# Altium PCB ir-24v.PcbDoc
Units mm, origin at the board's own origin, x right, y up, seen from the top; angles counter-clockwise.
Board outline 326.8 x 258 mm, 2 copper layers (Top Layer, Bottom Layer); 34 components, 31 nets, 92 pads, 0 vias.
Unrouted connection lines stored in the file: 1.
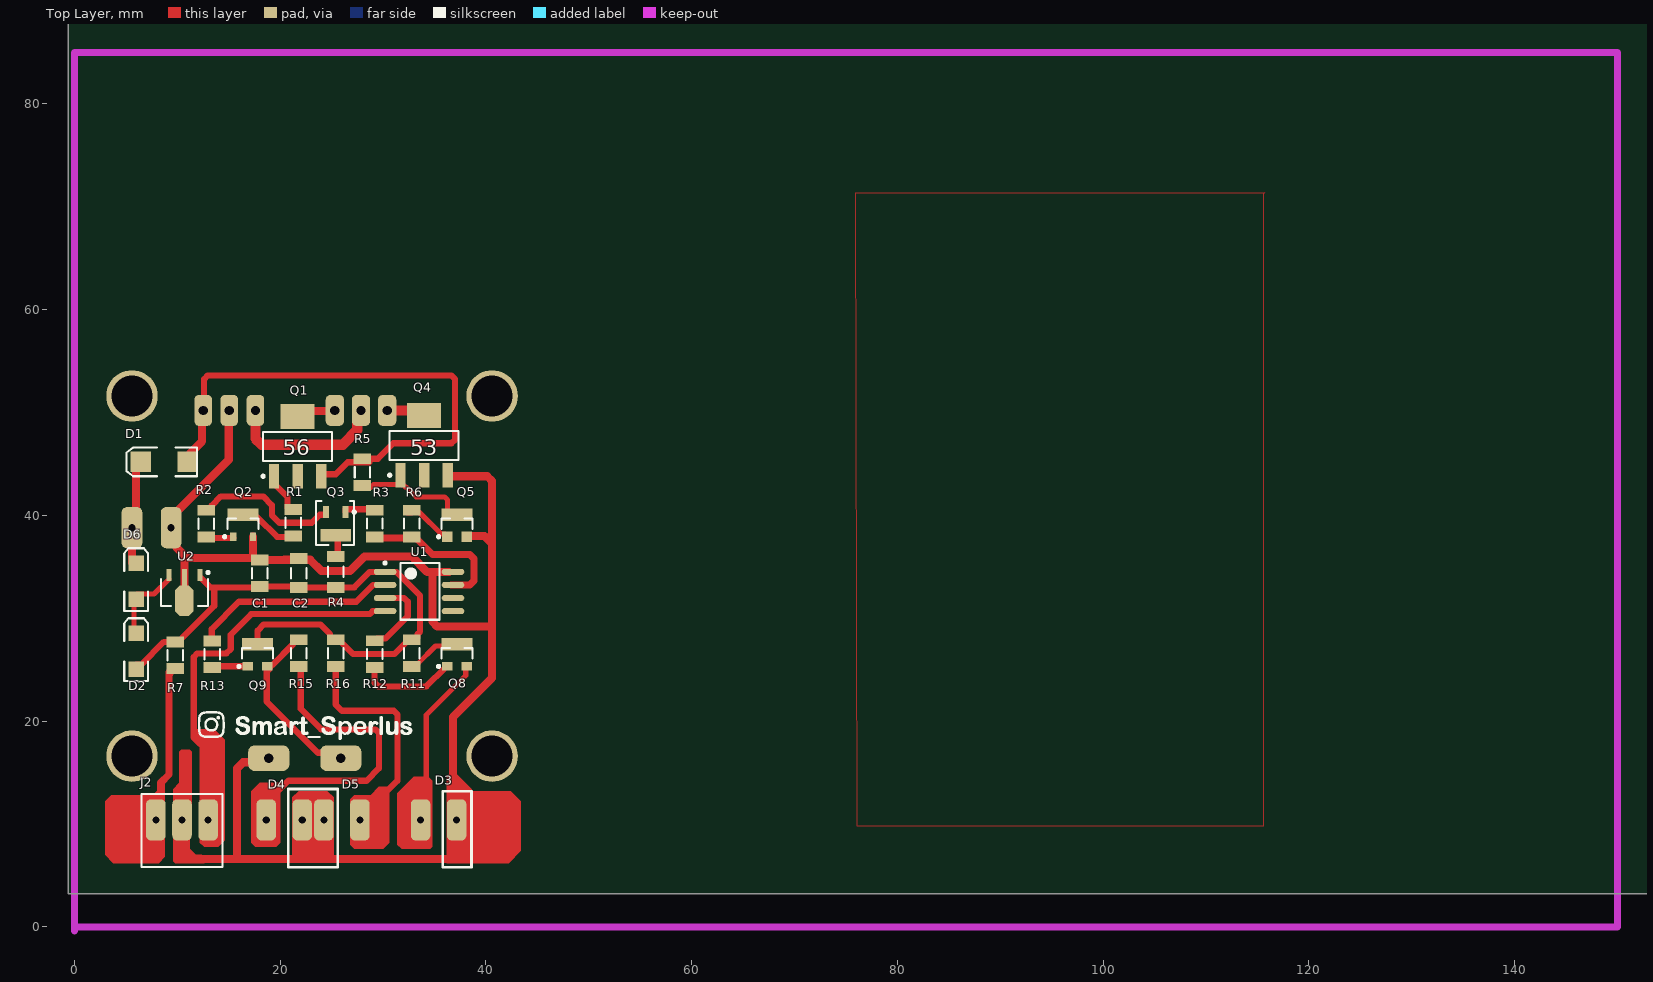
[diagram p0: Top Layer view]
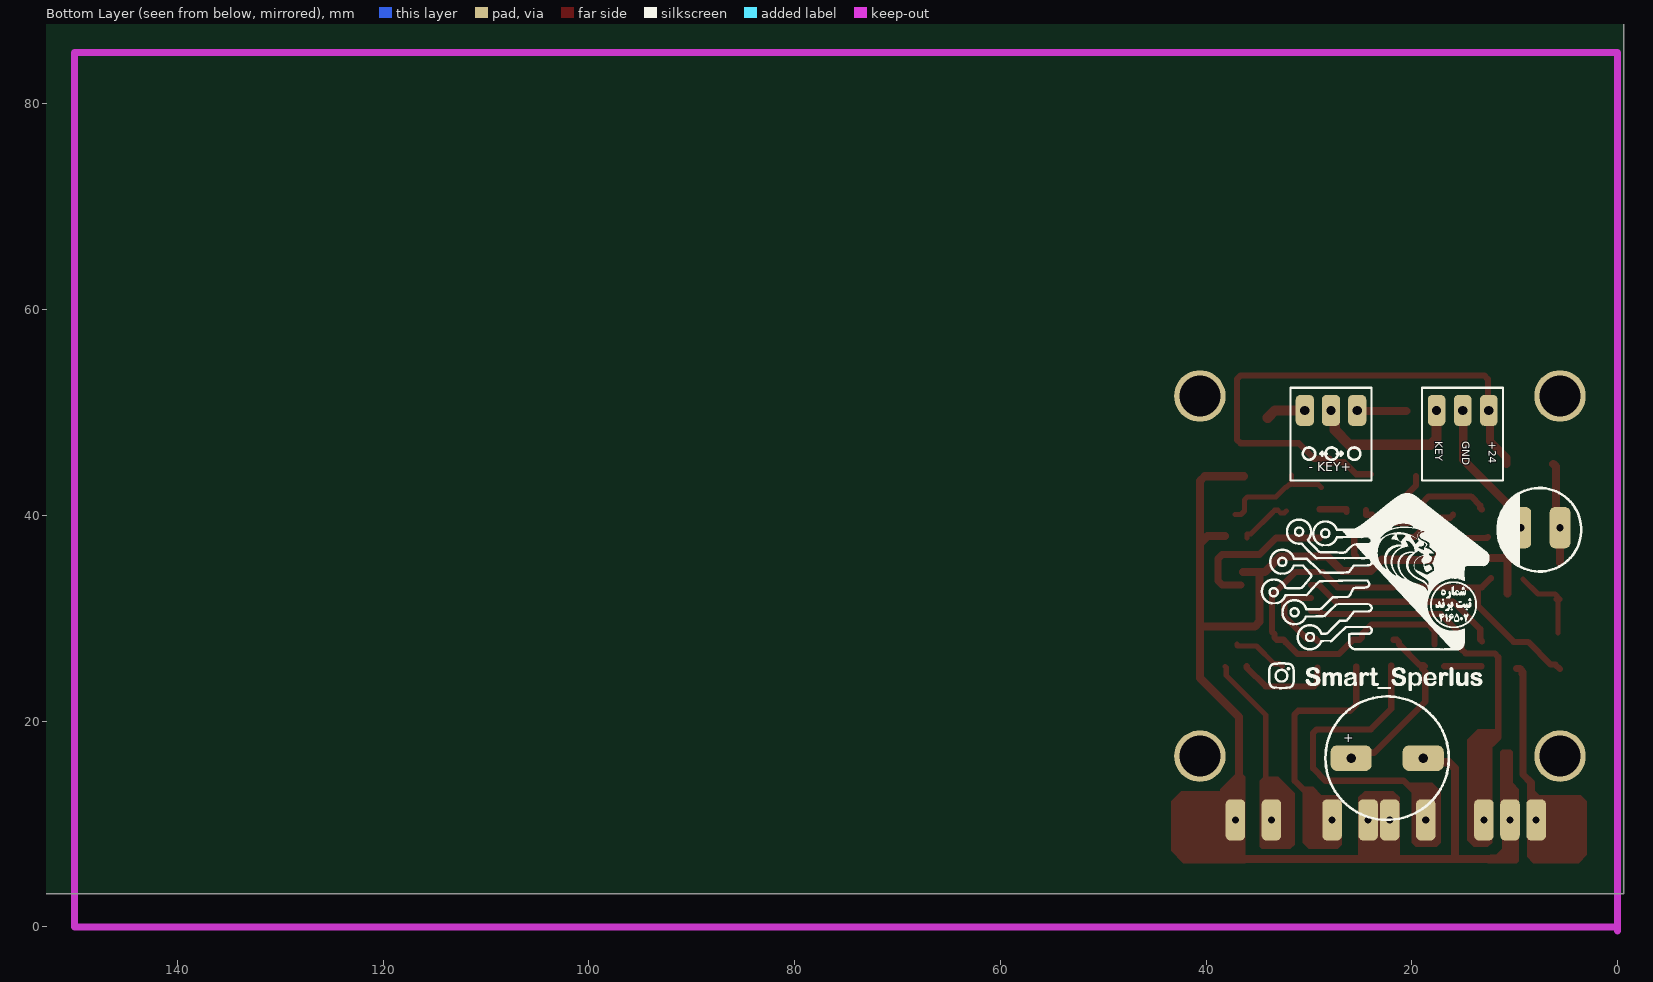
[diagram p1: Bottom Layer view, seen from below]
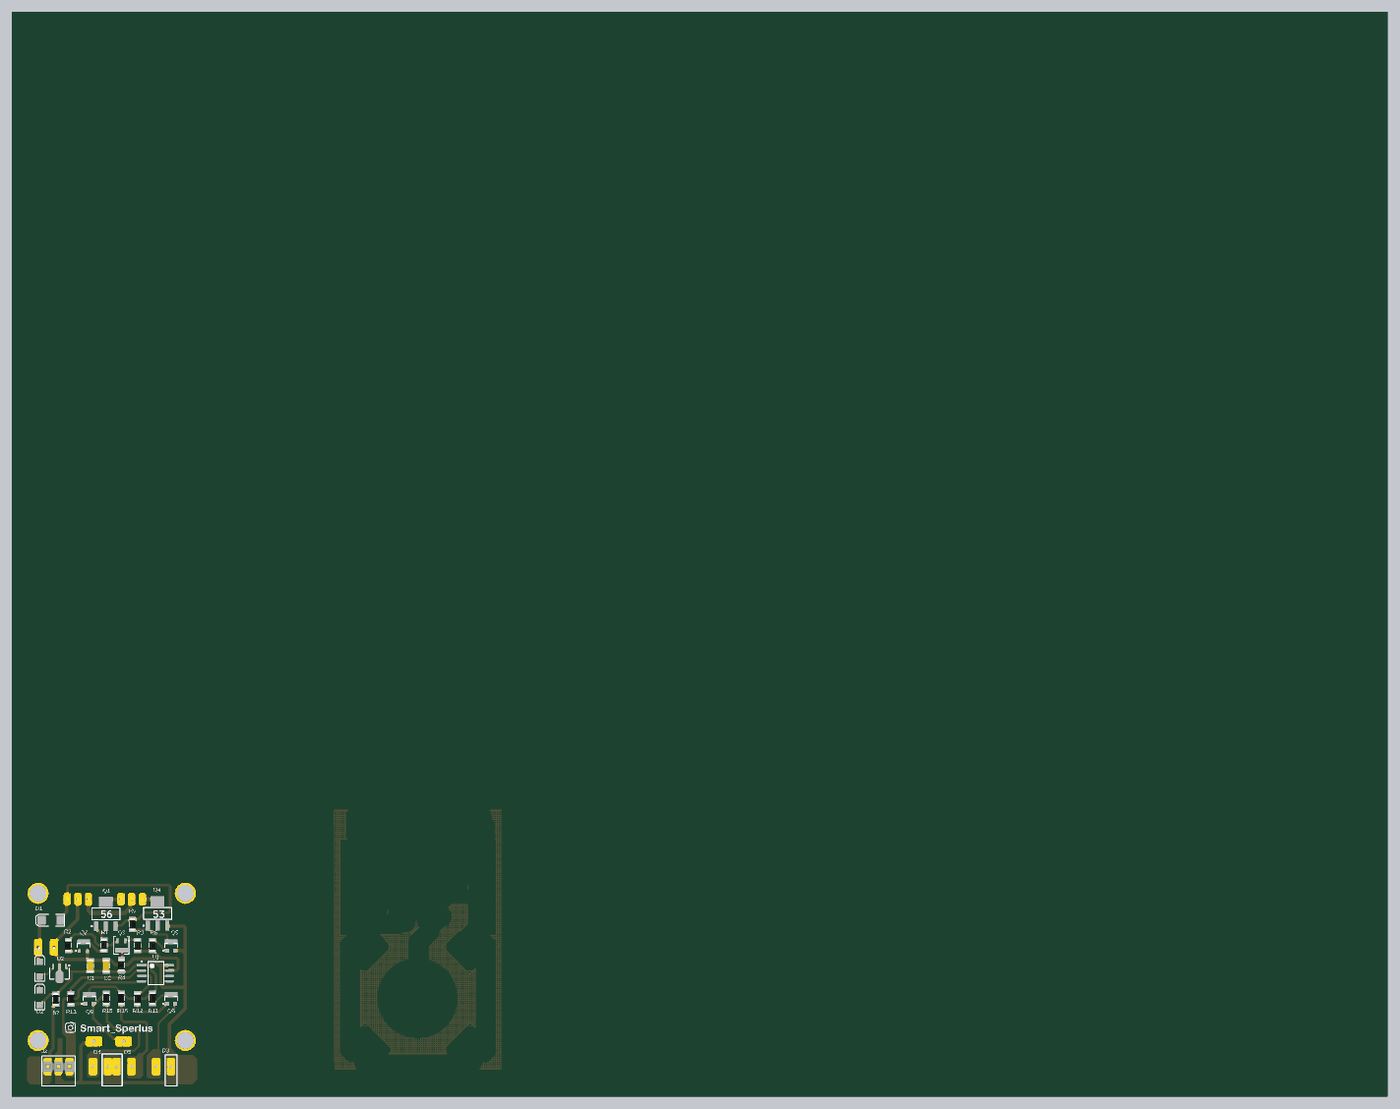
[diagram p2: 3D render of the assembled board from above, using the file's embedded part models]
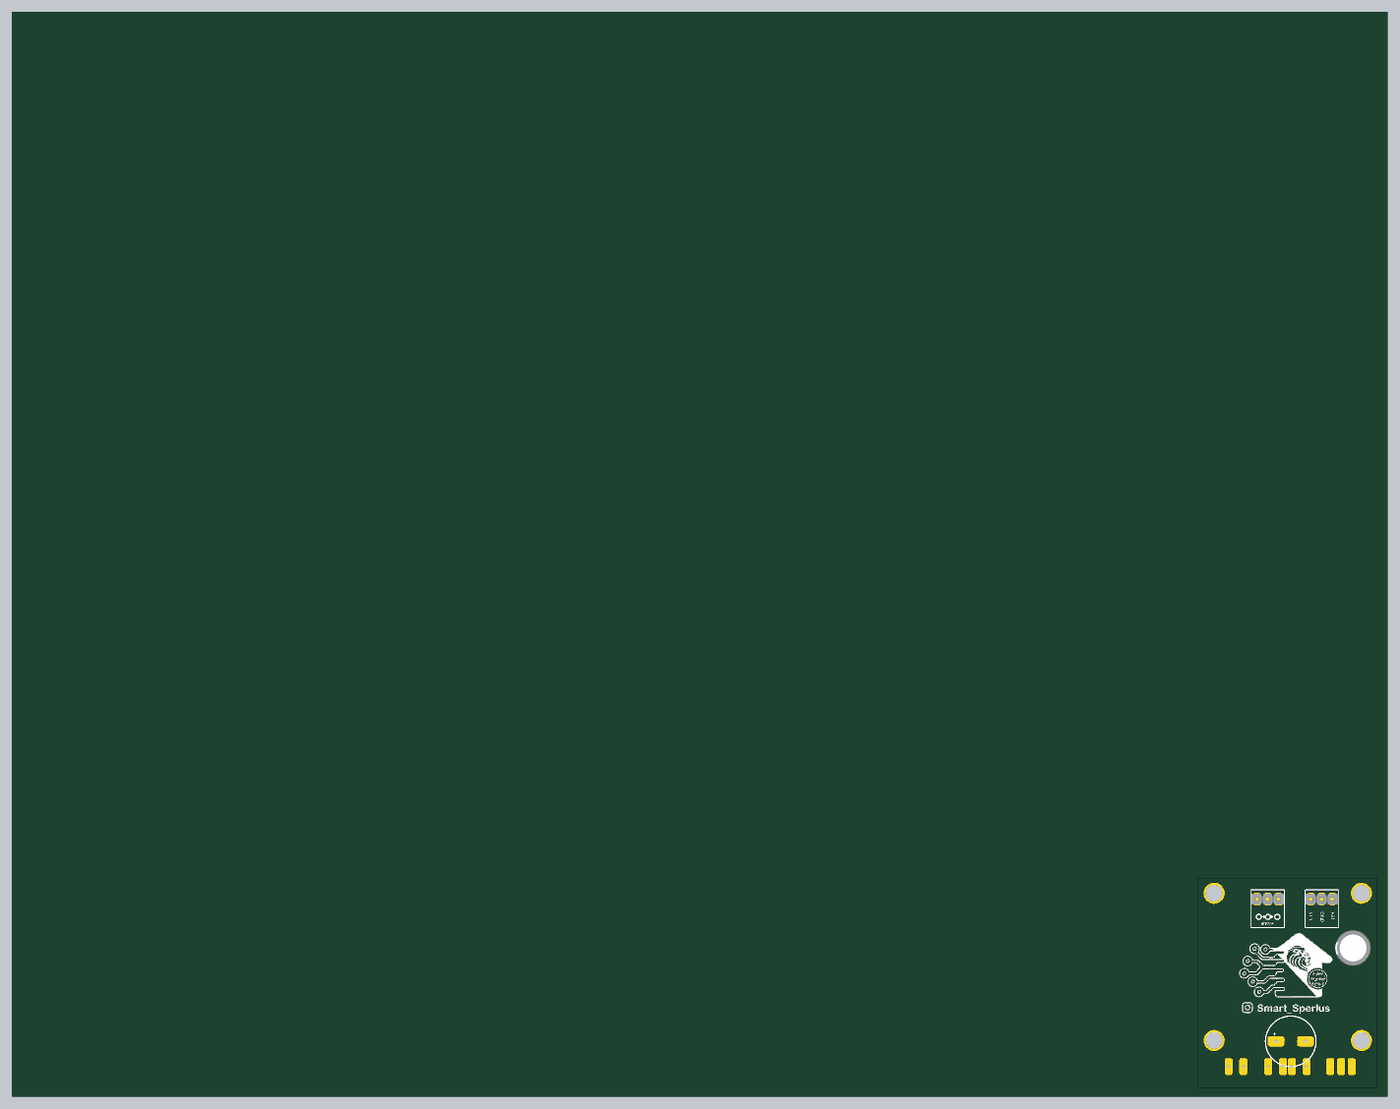
[diagram p3: 3D render of the assembled board from below, using the file's embedded part models]

## Layer stack, top to bottom
Top Solder: solder mask 0.0102, Solder Resist, Dk 3.5
Top Layer: signal copper 0.0356
Dielectric 1: dielectric 0.32, FR-4, Dk 4.8
Bottom Layer: signal copper 0.0356
Bottom Solder: solder mask 0.0102, Solder Resist, Dk 3.5

## Board outline
-0.6,3.2 -0.6,261.2 326.2,261.2 326.2,3.2

## Design rules (kind name [scope] priority, off if disabled: settings)
Clearance Clearance_1 [InPolygon] p1: gap=1 ignorepadtopadclearanceinfootprint=FALSE
Clearance [All] p2: gap=0.4 ignorepadtopadclearanceinfootprint=FALSE
PolygonConnect [All] p1: connectstyle=Relief reliefconductorwidth=0.254 reliefentries=4 polygonreliefangle="90 Angle" airgapwidth=0.254
RoutingLayers [All] p1: top layer_v5=FALSE bottom layer_v5=TRUE
RoutingVias [All] p1: holewidth=0.711 width=2.5 viastyle="Through Hole" minholewidth=0.711 minwidth=1.27 maxholewidth=0.711 maxwidth=2
SolderMaskExpansion [All] p1: expansion=0.102 istentingtop=FALSE
SupplyNets "Schematic Supply Nets" [InNet('GND')] p1: voltage=0.000
Width [All] p1: maxlimit=3 minlimit=0.4 preferedwidth=1
29 further rules are at their usual default settings.

## Classes and differential pairs
component class ir-24v: D21 D22 D23 J8 JP? P5 P7 R22 U17

## Components (designator, comment, footprint, x,y, rotation, side; value= is the part's Value field where it differs from the comment)
Buzzer1 "Buzzer" BUZZER 22.4,16.4 r180 bottom
C1 "=Value" "CAP 1206"#1 18,34.4 r270 top
C2 "=Value" "CAP 1206"#2 21.8,34.4 r270 top
C5 "=Value" ELEC-CAP-RAD15-30 7.6,38.6 r180 bottom
D1 "D Tunnel1" 3.2X1.6X1.1#1 9,45.2 r180 top
D2 "D Tunnel1" 3.2X1.6X1.1#2 6,26.8 r90 top
D3 "LED2" 3.2X1.6X1.1#3 35.4,10.4 r0 top
D4 "LED2" 3.2X1.6X1.1#4 20.4,10.2 r0 top
D5 "LED2" 3.2X1.6X1.1#5 26,10.2 r180 top
D6 "D Tunnel1" 3.2X1.6X1.1#2 6,33.6 r90 top
J1 "Header3X1" "HEADER 3X1"#1 25.32,50.2 r0 bottom
J2 "Header3X1" "HEADER 3X1"#2 7.92,10.4 r0 top
J3 "Header3X1" "HEADER 3X1"#3 12.52,50.2 r0 bottom
Q1 "MOSFET-P4" SOT223_N 21.7,46.7 r90 top
Q2 "QNPN" SOT-23B_L#1 16.4,39 r90 top
Q3 "PNP" SOT-23B_N 25.4,39.2 r270 top
Q4 "MOSFET-P4" SOT223_N 34,46.8 r90 top
Q5 "QNPN" SOT-23B_L#2 37.2,39 r90 top
Q8 "QNPN" SOT-23B_L#3 37.2,26.4 r90 top
Q9 "QNPN" SOT-23B_L#3 17.8,26.4 r90 top
R1 "10K" "RES 1206 (3216X08L)"#1 21.268,39.276 r90 top
R2 "10K" "RES 1206 (3216X08L)"#1 12.8,39.2 r270 top
R3 "10K" "RES 1206 (3216X08L)"#1 29.2,39.2 r90 top
R4 "10K" "RES 1206 (3216X08L)"#2 25.4,34.505 r270 top
R5 "10K" "RES 1206 (3216X08L)"#1 28,44.2 r90 top
R6 "10K" "RES 1206 (3216X08L)"#1 32.8,39.2 r90 top
R7 "10K" "RES 1206 (3216X08L)"#1 9.8,26.4 r90 top
R11 "10K" "RES 1206 (3216X08L)"#1 32.8,26.6 r90 top
R12 "10K" "RES 1206 (3216X08L)"#1 29.187,26.524 r270 top
R13 "10K" "RES 1206 (3216X08L)"#1 13.4,26.505 r270 top
R15 "10K" "RES 1206 (3216X08L)"#1 21.8,26.6 r90 top
R16 "10K" "RES 1206 (3216X08L)"#1 25.4,26.6 r90 top
U1 "ATtiny15L-1SC" 8S2_N 33.6,32.6 r0 top
U2 "LM1117MP-3.3" SOT89L 10.7,32.5 r270 top

## Footprints (in the part's own frame and the unit in brackets; to place one, negate y for a bottom-side part, rotate by r counter-clockwise, add the part's x,y. Pads: shape width x height; smd on the part's side, far side on the other; paste and mask are expansions set on the pad)
3.2X1.6X1.1#1 [mm] "SMT LED; 2 Flat Leads"
  rect 2x2 smd: 1(-2,0) 2(2.55,0)
  silkscreen extent -2.9,-1.4 3.95,1.4
3.2X1.6X1.1#2 [mm] "SMT LED; 2 Flat Leads"
  rect 1.5x1.5 smd: 1(-1.75,0) 2(1.75,0)
  silkscreen extent -2.9,-1.15 3.2,1.15
3.2X1.6X1.1#3 [mm] "SMT LED; 2 Flat Leads"
  rrect50% 1.9x4 hole 0.7: 1(-1.75,0) 2(1.75,0)
3.2X1.6X1.1#4 [mm] "SMT LED; 2 Flat Leads"
  rrect50% 1.9x4 hole 0.7: 1(-1.75,0.2) 2(1.75,0.2)
3.2X1.6X1.1#5 [mm] "SMT LED; 2 Flat Leads"
  rrect50% 1.9x4 hole 0.7: 1(-1.75,-0.2) 2(1.75,-0.2)
8S2_N [mm] "SOP, 8-Leads, Body 5.3x5.3mm, Pitch 1.27mm, IPC Medium Density"
  oval 2.2x0.6 smd: 1(-3.4,1.905) 2(-3.4,0.635) 3(-3.4,-0.635) 4(-3.4,-1.905) 5(3.2,-1.905) 6(3.2,-0.635) 7(3.2,0.635) 8(3.2,1.905)
  silkscreen extent -3.52,-2.75 1.9,2.88, body extent -2.73,-2.75 2.73,2.75, height 2.16
BUZZER [mm] "BUZZER"
  rrect50% 4x2.5 hole 0.9: 1(-3.5,0) 2(3.5,0)
  silkscreen extent -6,-6 6,6
"CAP 1206"#1 [mm]
  rect 1.05x1.7 smd: 1(-1.27,0) 2(1.326,0)
  silkscreen extent -0.47,-0.75 0.53,0.75, body extent -1.49,-0.77 1.55,0.75, height 0.75
"CAP 1206"#2 [mm]
  rect 1.05x1.7 smd: 1(-1.4,0) 2(1.4,0)
  silkscreen extent -0.47,-0.75 0.53,0.75, body extent -1.49,-0.77 1.55,0.75, height 0.75
ELEC-CAP-RAD15-30 [mm]
  rrect50% 2x4 hole 0.7: 1(-1.8,0.2) 2(2,0.2)
  silkscreen extent -4.06,-4.06 4.06,4.06, body extent -4.25,-4.25 4.24,4.25, height 15.46
"HEADER 3X1"#1 [mm]
  rrect50% 1.778x3 hole 0.9: 1(0,0) 2(2.54,0) 3(5.08,0)
  silkscreen extent -1.4,-2.2 6.48,6.8, body extent -1.24,-1.27 6.38,1.27, height 8.38
"HEADER 3X1"#2 [mm]
  rrect50% 1.9x4 hole 0.7: 1(0,0) 2(2.54,0) 3(5.08,0)
  silkscreen extent -1.4,-4.6 6.48,2.52, body extent -1.24,-1.27 6.38,1.27, height 8.38
"HEADER 3X1"#3 [mm]
  rrect50% 1.7x3 hole 0.9: 1(0,0) 2(2.54,0) 3(5.08,0)
  silkscreen extent -1.4,-2.2 6.48,6.8, body extent -1.24,-1.27 6.38,1.27, height 8.38
"RES 1206 (3216X08L)"#1 [mm] "Chip Resistor, 2-Leads, Body 3.2x1.6mm, IPC High Density _ (0.125 W)"
  rect 1.05x1.7 smd: 1(-1.295,0) 2(1.301,0)
  silkscreen extent -0.5,-0.75 0.5,0.75, body extent -1.52,-0.76 1.53,0.76, height 0.6
"RES 1206 (3216X08L)"#2 [mm] "Chip Resistor, 2-Leads, Body 3.2x1.6mm, IPC High Density _ (0.125 W)"
  rect 1.05x1.7 smd: 1(-1.495,0) 2(1.505,0)
  silkscreen extent -0.5,-0.75 0.5,0.75, body extent -1.52,-0.76 1.53,0.76, height 0.6
SOT89L [mm] "SOT89, 3-Leads, Body 4.5x2.4 mm, Pitch 1.5mm, Lead Span 4.1mm, IPC High Density"
  rect 1.2x0.5 smd: 1(-1.7,1.5) 3(-1.7,-1.5)
  rect 1.6x0.5 smd: 2(-1.5,0)
  oct 3x1.8 smd: 2(0.8,0)
  silkscreen extent -2.07,-2.3 1.3,2.43, body extent -1.3,-2.3 1.3,2.3, height 1.6
SOT223_N [mm] "SOT223, 4-Leads, Body 6.5x3.5mm, Pitch 2.3mm, Lead Span 7mm, IPC Medium Density"
  rect 2.4x1 smd: 1(-2.9,2.3) 2(-2.9,0) 3(-2.9,-2.3)
  rect 2.4x3.3 smd: 4(2.9,0)
  silkscreen extent -3.02,-3.35 1.4,3.47, body extent -1.85,-3.35 1.85,3.35, height 1.7
SOT-23B_L#1 [mm] "SOT23, 3-Leads, Body 2.9x1.3mm, Pitch 0.95mm, Lead Span 2.4mm, IPC High Density"
  rect 0.85x0.6 smd: 1(-1.075,0.95) 2(-1.075,-0.95)
  rect 1.2x3 smd: 3(1.075,0)
  silkscreen extent -1.2,-1.5 0.7,1.92, body extent -0.7,-1.5 0.7,1.5, height 1.14
SOT-23B_L#2 [mm] "SOT23, 3-Leads, Body 2.9x1.3mm, Pitch 0.95mm, Lead Span 2.4mm, IPC High Density"
  rect 1x1 smd: 1(-1.075,0.95) 2(-1.075,-0.95)
  rect 1.2x3 smd: 3(1.075,0)
  silkscreen extent -1.2,-1.5 0.7,1.92, body extent -0.7,-1.5 0.7,1.5, height 1.14
SOT-23B_L#3 [mm] "SOT23, 3-Leads, Body 2.9x1.3mm, Pitch 0.95mm, Lead Span 2.4mm, IPC High Density"
  rect 0.85x1 smd: 1(-1.075,0.95) 2(-1.075,-0.95)
  rect 1.2x3 smd: 3(1.075,0)
  silkscreen extent -1.2,-1.5 0.7,1.92, body extent -0.7,-1.5 0.7,1.5, height 1.14
SOT-23B_N [mm] "SOT23, 3-Leads, Body 2.9x1.3mm, Pitch 0.95mm, Lead Span 2.4mm, IPC Medium Density"
  rect 1.15x0.6 smd: 1(-1.125,0.95) 2(-1.125,-0.95)
  rect 1.2x3 smd: 3(1.125,0)
  silkscreen extent -2.2,-1.9 2.1,1.93, body extent -0.7,-1.5 0.7,1.5, height 1.14

## Part data
C1 C2: library part Capacitor, "Capacitor"
C5: library part "Capacitor Electrolytic", "Electrolytic Capacitor"
D1 D2 D6: "Tunnel Diode - RLC Model", LatestRevisionDate=17-Jul-2002, LatestRevisionNote="Re-released for DXP Platform.", PackageDescription="SM LED; 2 Flat Leads", PackageReference=3.2X1.6X1.1, PackageVersion=Feb-2002, Published=8-Jun-2000, Publisher="Altium Limited", Simulation ModelName=DTUNNEL1, Simulation PortMap=(1:1),(2:2)
D3 D4 D5: "Typical RED, GREEN, YELLOW, AMBER GaAs LED", LatestRevisionDate=17-Jul-2002, LatestRevisionNote="Re-released for DXP Platform.", PackageDescription="SM LED; 2 Flat Leads", PackageReference=3.2X1.6X1.1, PackageVersion=Feb-2002, Published=8-Jun-2000, Publisher="Altium Limited", Simulation ModelName=LED2, Simulation PortMap=(1:1),(2:2)
Q1 Q4: "P-Channel MOSFET, Externally Terminated Substrate", Code_IPC=SOT223-4, Code_JEDEC=TO-261-AA-B, Code_JEITA=SC-75, LatestRevisionDate=29-May-2009, LatestRevisionNote="IPC-7351 Footprint Added.", PackageDescription="4-Pin SOT-223 Package 2.3 mm Pitch, 7 mm Lead Span", PackageReference=SOT223, PackageVersion=2002, Published=24-Mar-1999, Publisher="Altium Limited", Simulation ModelName=PMOS, Simulation PortMap=(1:2),(2:1),(3:4),(4:3)
Q2 Q5 Q8 Q9: "NPN Bipolar Transistor", LatestRevisionDate=29-May-2009, LatestRevisionNote="IPC-7351 Footprint Added.", PackageDescription="3-Pin SOT-23 Package 0.95 mm Pitch, 2.4 mm Lead Span", PackageReference=SOT-23B, PackageVersion=Aug-1999, Published=8-Jun-2000, Publisher="Altium Limited", Simulation ModelName=QNPN, Simulation PortMap=(1:1),(2:2),(3:3)
Q3: "PNP Bipolar Transistor", LatestRevisionDate=29-May-2009, LatestRevisionNote="IPC-7351 Footprint Added.", PackageDescription="3-Pin SOT-23 Package 0.95 mm Pitch, 2.4 mm Lead Span", PackageReference=SOT-23B, PackageVersion=Aug-1999, Published=8-Jun-2000, Publisher="Altium Limited", Simulation ModelName=PNP, Simulation PortMap=(1:1),(2:2),(3:3)
R1 R2 R3 R4 R5 R6 R7 R11 R12 R13 R15 R16: library part Resistor, "Resistor", Power="1/4 W", Tolerance=5%, Simulation ModelName="Model Name", Simulation PortMap=(1:1),(2:2)
U1: "8-Bit AVR Microcontroller with 1K Byte of Flash Memory", Supplier Part Number 1=ATTINY15L-1SC-ND, ComponentLink1Description=Datasheet, ComponentLink1URL=http://www.atmel.com/dyn/resources/prod_documents/doc1187.pdf, ComponentLink2Description="Atmel.com Home", ComponentLink2URL=http://www.atmel.com, DatasheetVersion=1187E-AVR-06/02, LatestRevisionDate=16-Oct-2006, LatestRevisionNote="IPC-7351 Footprint Added.", PackageDescription="8-Lead, 0.208\" Body, Plastic Small Outline Package (EIAJ)", PackageReference=8S2, PackageVersion="revF, Apr-2008", Published=17-Sep-2003, Publisher="Altium Limited", Supplier 1=Digi-Key, Supplier 2=Mouser, Supplier Part Number 2=556-ATTINY15L1SC
U2: "800mA Low-Dropout Linear Regulator", DigiKeyPartNumber=LM1117MP-3.3CT-ND, Manufacturer="National Semiconductor", PackageTopMarking=XYTT*N05A, PowerWise=N, Code_IPC=SOT223-4, Code_JEDEC=TO-261-AA, ComponentLink1Description="LM1117 Datasheet", ComponentLink1URL=http://www.national.com/ds/LM/LM1117.pdf, ComponentLink2Description="LM1117 Web Page", ComponentLink2URL=http://www.national.com/pf/LM/LM1117.html, ComponentLink3Description="MP04A Package Page", ComponentLink3URL=http://www.national.com/packaging/folders/mp04a.html, CompType="LDO IC", DatasheetVersion=Apr-2006, PackageDescription="Molded SOT-223, 6.50 x 3.56 x 1.6mm Body, 4 Lead, 2.3mm Pitch", PackageReference=MP04A, PackageVersion="revB, Apr-2003", PartNumber=LM1117MP-3.3, PinCount=4, Published=4-Dec-2008, Publisher="Altium Limited", RoHS=O
Buzzer1: ComponentLinkURL=www.picpars.com, Designer="Seyed Mohsen Ghasemain"

## Free pads (board coordinates)
  round 5 hole 4: 2(5.6,51.6) 2(40.6,16.6) 3(5.6,16.6) 5(40.6,51.6)

## Nets (pads, with @x,y where several pads share a name; then routed paths per layer and width w, separated by ;. In a path a pad name is that pad's centre, name@x,y a point inside that pad or via, vN(x,y) a via of type N, cw(c..) or ccw(c..) an arc to the next point about the centre after c; other vN are vias at no path point)
bizer: R13.1 U1.2 | length 19.5
  Top Layer w0.6: R13.1@13.18,27.75 13.35,27.92 13.35,28.95 16,31.6 27.4,31.6 29.035,33.235 U1.2@29.8,33.235
GND: Buzzer1.2 C1.1 C2.1 C5.1 D3.2 D4.2 D5.2 J2.2 J3.2 pad.2@5.6,51.6 Q2.2 Q4.3 Q5.2 U1.8 U2.2 | length 151.6
  Top Layer w0.8: C5.1 9.938,38.262 9.938,36.862 10.8,36 ; C5.1@9.8,38.8 9.965,38.965 9.965,40.365 10.95,41.35 10.95,41.352 11.419,41.82 11.42,41.82 15,45.4 J3.2@15,49.607 ; J2.2@10.46,9.6 10.46,7.069 10.929,6.6 15.8,6.6 ; U2.2@10.7,32.4 10.7,34 10.7,35.857 C1.1@17.488,35.857 ; 16.8,16 16.392,16 15.8,15.408 15.8,6.6 ; Q2.2 17.35,35.995 C1.1@17.488,35.857 ; 20.4,35.67 C1.1 17.675,35.67 C1.1@17.488,35.857 ; 20.4,35.675 22.925,35.675 24,34.6 26.8,34.6 28.2,36 32.8,36 34.295,34.505 35,34.505 ; D4.2@22.15,11 23.2,11 ; D5.2@24.25,11 23.2,11 ; Q4.3@36.312,43.8 40.131,43.8 40.6,43.331 40.6,37.275 ; U1.8@36.4,34.505 35,34.505 ; Q5.2@38.15,38 39.875,38 40.6,37.275 ; 15.8,6.6 23.2,6.6 ; 23.2,6.6 23.2,11 ; 23.2,6.6 36.681,6.6 37.15,7.069 37.15,9.6 37.15,11.954 36.8,12.304 36.8,20.4 40.6,24.2 40.6,29.2 ; 35,34.505 34.8,34.305 34.8,29.669 35.269,29.2 40.6,29.2 ; 40.6,29.2 40.6,37.275
ir-r: J2.3 U1.4 | length 36.1
  Top Layer w0.6: J2.3@12.949,11.56 12.949,17.051 11.6,18.4 11.6,26.224 11.951,26.575 14.775,26.575 15.2,27 15.2,28.4 17.2,30.4 28.705,30.4 29,30.695 U1.4@29.8,30.695
ir-t: R12.1 U1.3 | length 8.4
  Top Layer w0.6: R12.1 29.412,28.045 30.245,28.045 32.4,30.2 32.4,31.614 32.049,31.965 U1.3@29.8,31.965
key: J1.2 J3.3 | length 14.5
  Top Layer w1: J3.3@17.6,49.14 17.6,47.461 18.186,46.876 26.076,46.876 27.505,48.305 27.505,49.845 J1.2
key+: J1.1 Q1.4 | length 4.8
  Top Layer w0.8: Q1.4@20.55,50.15 25.17,50.15 J1.1@25.32,50
key-: J1.3 Q4.4 | length 3.9
  Top Layer w1: J1.3 33.3,50.2 Q4.4@34,49.5
NetBuzzer1_1: Buzzer1.1 Q9.2 R15.2 | length 17.3
  Top Layer w0.6: Q9.2 18.875,25.45 19.25,25.45 21.25,27.45 21.25,27.676 21.475,27.901 R15.2 ; Q9.2@19.025,25.125 18.698,24.799 18.698,21.902 23.672,16.928 24.972,16.928 Buzzer1.1@25.9,16
NetD2_2: D2.2 D6.1 U2.3 | length 7.8
  Top Layer w0.5: D6.1@5.6,31.85 6.1,32.35 7.75,32.35 U2.3@9.199,33.799 ; D2.2@5.8,28.55 5.8,31.65 D6.1
NetD3_1: D3.1 Q8.2 | length 15.3
  Top Layer w0.5: D3.1@33.65,11.85 34.2,12.4 34.2,20.6 38.045,24.445 38.045,25.22 Q8.2
NetD4_1: D4.1 R15.1 | length 30.4
  Top Layer w0.6: D4.1@18.65,10.2 19.227,10.777 19.227,12.627 20.8,14.2 28.4,14.2 29.6,15.4 29.6,18.849 29.249,19.2 24,19.2 22,21.2 R15.1@22,25.408
NetD5_1: D5.1 R16.1 | length 21.8
  Top Layer w0.6: R16.1 25.4,21.6 26,21 31.049,21 31.4,20.649 31.4,14.2 29.047,11.847 27.764,11.847 D5.1@27.317,11.4
NetJ2_1: J2.1 R7.1 | length 15.3
  Top Layer w0.7: J2.1@8.12,11 8.401,11.281 8.401,14.001 9.2,14.8 9.2,24.505 ; R7.1@9.2,24.767 9.2,24.505 ; R7.1 9.475,25.105 9.3,24.93 9.3,24.605 9.2,24.505
NetQ1_1: Q1.1 R1.2 | length 4
  Top Layer w0.6: Q1.1@19.6,43.837 19.6,42.9 20.718,41.782 20.718,40.707 R1.2@21,40.425
NetQ2_1: Q2.3 R1.1 | length 5.3
  Top Layer w0.6: Q2.3@16,40.075 16.3,39.775 17.825,39.775 19.695,37.905 20.4,37.905
NetQ2_2: Q2.1 R2.2 | length 2.9
  Top Layer w0.6: R2.2@12.6,37.899 12.699,37.8 Q2.1@15.45,37.8
NetQ3_1: Q3.3 R4.1 | length 2.2
  Top Layer w0.6: R4.1 25.6,36.2 25.6,37.875 Q3.3
NetQ3_2: Q3.1 R3.2 | length 2.9
  Top Layer w0.6: Q3.1 26.35,40.6 R3.2@28.974,40.6
NetQ3_3: Q3.2 R2.1 | length 14.3
  Top Layer w0.6: R2.1@13.2,40.57 13.35,40.72 13.35,40.95 14.238,41.838 18.362,41.838 19.2,41 19.2,40 19.924,39.276 23.076,39.276 23.85,40.05 24.45,40.05 Q3.2@24.45,40.488
NetQ4_1: Q4.1 Q5.3 R5.1 | length 11.4
  Top Layer w0.5: R5.1@28.8,42.705 29.095,43 31.45,43 31.7,43.25 Q4.1@31.7,43.45 ; Q4.1@31.7,43 Q4.1@31.7,43.45 ; Q4.1 Q4.1@31.7,43.45 ; Q4.1@31.9,43 32.15,42.75 32.25,42.75 33.2,41.8 35.975,41.8 36.268,41.507 36.268,40.425 36.618,40.075 Q5.3
NetQ5_2: Q5.1 R6.2 | length 5
  Top Layer w0.5: R6.2@32.186,40.439 32.4,40.226 32.586,40.226 R6.2@32.774,40.226 ; R6.2@33,40.501 33.325,40.501 33.6,40.226 35.651,38.175 36,38.175 36.02,38.155 Q5.1@36.02,37.806
NetQ8_1: Q8.3 R11.1 | length 5.4
  Top Layer w0.5: R11.1@32.6,25.305 32.875,25.58 33.38,25.58 35.1,27.3 36.95,27.3 37,27.35 Q8.3@37,27.475
NetQ8_2: Q8.1 R12.2 | length 9.4
  Top Layer w0.6: R12.2 29.187,23.724 29.539,23.372 34.222,23.372 36.05,25.2 Q8.1@36.05,25.325
NetQ9_2: Q9.1 R13.2 | length 3.6
  Top Layer w0.6: R13.2@13.235,25.325 Q9.1
NetQ10_1: 
NetQ10_2: 
NetQ10_3: 
out: R3.1 R6.1 U1.7 | length 15.2
  Top Layer w0.7: R3.1@29,37.8 31.8,37.8 33.2,37.8 34.8,36.2 38.44,36.2 38.85,35.79 38.85,33.645 38.44,33.235 U1.7@36.6,33.235
vcc: C1.2 C2.2 D2.1 Q9.3 R4.2 R7.2 R11.2 R16.2 U1.1 U2.1 | length 59
  Top Layer w0.6: D2.1@5.6,25.05 6.05,25.5 6.5,25.5 8.701,27.701 R7.2 10.101,27.701 13.6,31.2 13.6,33 ; U2.1@12.317,33.883 13.2,33 13.6,33 ; Q9.3 17.8,28.8 18.4,29.4 23.901,29.4 24.85,28.451 24.85,28.126 25.075,27.901 R16.2 25.725,27.901 25.95,27.676 25.95,27.65 27.076,26.524 31.124,26.524 32.25,27.65 32.25,27.676 32.475,27.901 R11.2 33.125,27.901 33.35,28.126 33.35,28.451 33.6,28.701 33.6,32.2 31.295,34.505 U1.1 28.705,34.505 27.2,33 R4.2 C2.2 21.726,33.074 C1.2 ; C1.2@18,33 13.6,33
vdd: C5.2 D1.2 D6.2 | length 9.9
  Top Layer w0.8: D6.2@5.6,35.392 C5.2 6,39.2 6,44.75 D1.2@6.25,45
vdd-a: D1.1 J3.1 Q1.3 R5.2 | length 54.4
  Top Layer w0.6: J3.1@12.6,50.185 12.6,53.249 12.951,53.6 36.649,53.6 37,53.249 37,47.351 36.649,47 31,47 29.501,45.501 R5.2 ; Q1.3@24,44 25.4,44 26.563,45.163 R5.2@28.662,45.163
  Top Layer w0.8: D1.1@10.8,45 10.8,45.6 12.4,47.2 J3.1@12.4,50.198
pads on no net: Q1.2 Q4.2 U1.5 U1.6

## Polygon pours and split planes (outlines as drawn)
GND on Top Layer "NONET_L01_P024" (hatched 90Degree grid 0.5 track 0.2, shelved, pour order 24): 75.946,71.374 115.697,71.374 115.57,71.247 115.57,9.779 76.073,9.779

## Keep-outs
Keep-Out Layer:
  lines w0.7: 0,-0.381 0,85 150,85 150,0 0,0

## Other copper
Top Layer:
  region net GND: 11.4,11.6 11.4,17 11.2,17.2 10.4,17.2 10.2,17 10.2,14 9.6,13.4 9.6,11.022
  region net NetD5_1: 26.8,8 27.2,7.6 30,7.6 30.6,8.2 30.6,13.4 30.4,13.6 29.6,13.6 28.8,12.8 27.2,12.8 26.8,12.4
  region net GND: 21.2,6.4 25.2,6.4 25.2,12.6 24.6,13.2 21.8,13.2 21.2,12.6
  region net NetD4_1: 20.4,14 18,14 17.2,13.2 17.2,8.2 17.6,7.8 19.6,7.8 20,8.2 20,13
  region net GND: 9.6,11.022 9.6,6.4 9.8,6.2 12.6,6.2 12.6,6.8 12.4,7 11.8,7 11.2,7.6 11.2,9.6
  region net NetJ2_1: 8.8,14 7.6,12.8 3.6,12.8 3,12.2 3,7 3.8,6.2 8.2,6.2 8.8,6.8
  region: 9.2,18.8
  region net ir-r: 12.2,17.6 11.4,18.4 11.4,18.8 11.8,19.2 13.6,19.2 14.6,18.2 14.6,8.4 14,7.8 12.6,7.8 12.2,8.2
  region net GND: 37.2,14.8 38.6,13.4 38.6,13.2 42.4,13.2 43.4,12.2 43.4,7.4 42.2,6.2 36.2,6.2 36.2,14.6 36.6,15
  region net NetD3_1: 33,14.6 31.4,13 31.4,8 31.8,7.6 34.6,7.6 34.8,7.8 34.8,14.2 34.4,14.6

## Silkscreen, mask and mechanical layers (free items; w line width, h text height)
Top Overlay:
  drawing of 24 lines, arcs and shapes, not listed
  text "56" at 20.254,45.854 h1.52
  text "53" at 32.654,45.854 h1.52
Bottom Overlay:
  drawing of 55 lines, arcs and shapes, not listed
  text "+24" at 12.8,47.2 h1.3 r90
  text "GND" at 15.386,47.2 h1.3 r90
  text "KEY" at 18,47.2 h1.3 r90
  text "- KEY+" at 30,44 h1.52
Bottom Solder:
  lines w0.2: 2,5.4 44.4,5.4 44.4,55.2 2,55.2 2,5.4
Mechanical 1:
  the board outline again, w0.2

## Text inside footprints (layer, text, board x,y; h text height)
Buzzer1: Bottom Overlay "+" at 26.661,17.67 h1.52